# Altium PCB RFID.PcbDoc
Units mil, origin at the board's own origin, x right, y up, seen from the top; angles counter-clockwise.
Board outline 6000 x 4000 mil, 2 copper layers (Top Layer, Bottom Layer); 15 components, 40 nets, 91 pads, 0 vias.
Unrouted connection lines stored in the file: 1.
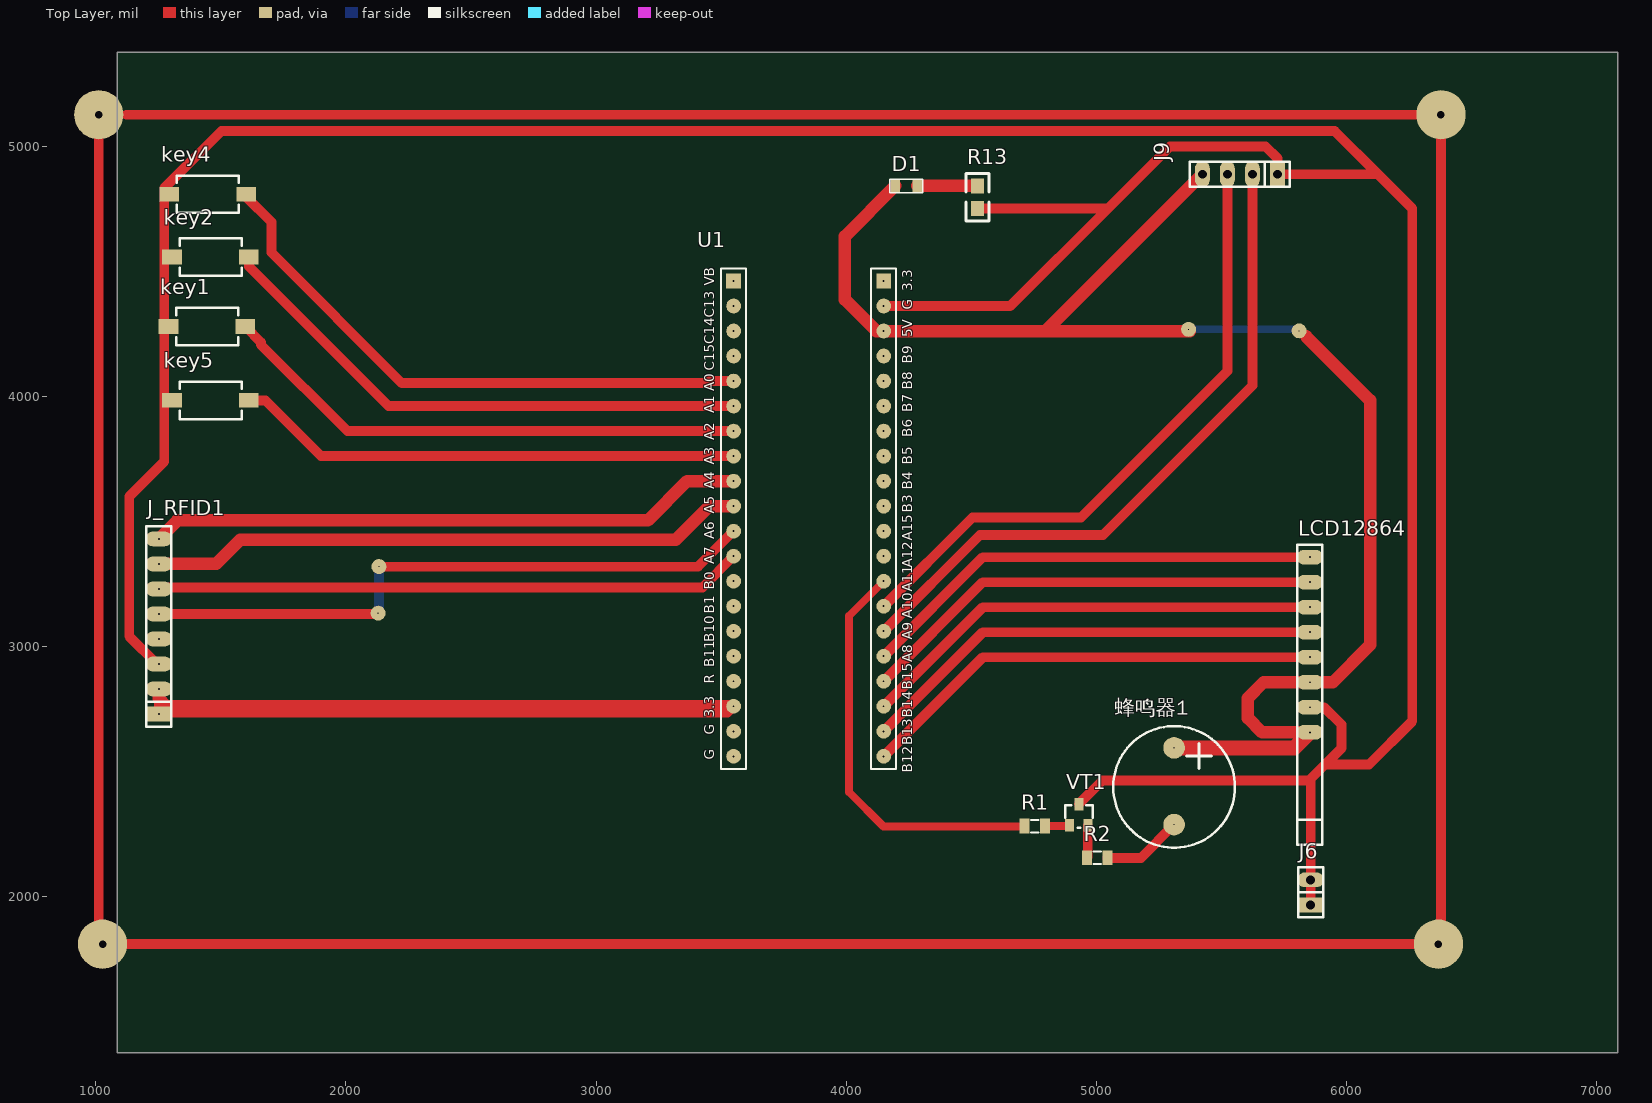
[diagram p0: Top Layer view]
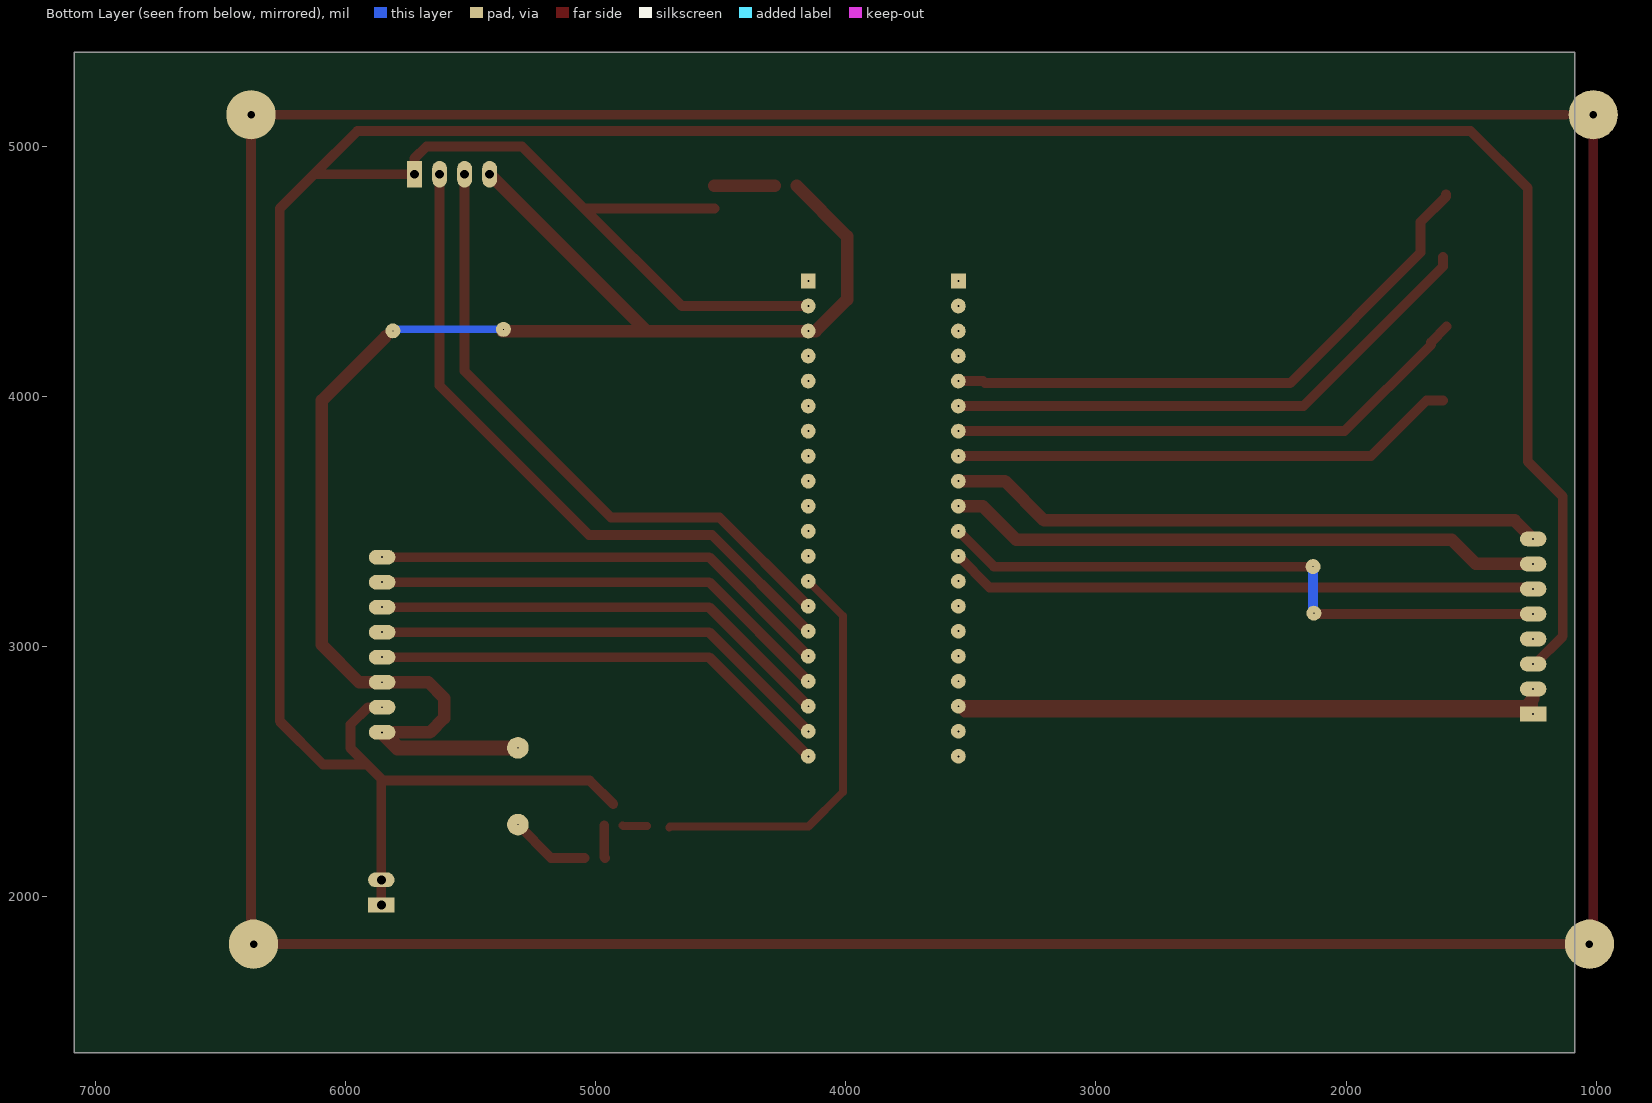
[diagram p1: Bottom Layer view, seen from below]

## Layer stack, top to bottom
Top Solder: solder mask 0.4, Solder Resist, Dk 3.5
Top Layer: signal copper 1.4
Dielectric1: dielectric 12.6, FR-4, Dk 4.8
Bottom Layer: signal copper 1.4
Bottom Solder: solder mask 0.4, Solder Resist, Dk 3.5

## Board outline
1085,1377 7085,1377 7085,5377 1085,5377

## Design rules (kind name [scope] priority, off if disabled: settings)
Clearance [All] p1: gap=10
PolygonConnect [All] p1: connectstyle=Relief reliefconductorwidth=10 reliefentries=4 polygonreliefangle="90 Angle" airgapwidth=10
RoutingVias [All] p1: holewidth=28 width=50 viastyle="Through Hole" minholewidth=28 minwidth=50 maxholewidth=28 maxwidth=50
SolderMaskExpansion [All] p1: expansion=4
Width [All] p1: maxlimit=100 minlimit=10 preferedwidth=39.37 minimp=50.000000 maximp=50.000000 favimp=50.000000
30 further rules are at their usual default settings.

## Components (designator, comment, footprint, x,y, rotation, side; value= is the part's Value field where it differs from the comment)
D1 "LED_O" D0805 4196,4842 r0 top
J6 "CON2" sip-2 5857,1968 r90 top
J9 "CON4" sip-4 5724,4889 r180 top
J_RFID1 "RFID_Reader" SIP-8 1252,2731 r90 top
key1 "" SW_SMD_P2 1598,4280 r180 top
key2 "" SW_SMD_P2 1612,4558 r180 top
key4 "" SW_SMD_P2 1601,4809 r180 top
key5 "" SW_SMD_P2 1612,3985 r180 top
LCD12864 "CON12" sip-12 5854,2258 r90 top
R1 "Res" 0805#1 4754,2283 r180 top
R2 "Res" 0805#1 5004,2156 r180 top
R13 "4.7K" 0805#2 4525,4842 r270 top
U1 "c8t6hxb" 48P 3400,2462 r90 top
VT1 "8550" SOT-23 4930,2324 r90 top
蜂鸣器1 "蜂鸣器" DB 5311,2596 r270 top

## Footprints (in the part's own frame and the unit in brackets; to place one, negate y for a bottom-side part, rotate by r counter-clockwise, add the part's x,y. Pads: shape width x height; smd on the part's side, far side on the other; paste and mask are expansions set on the pad)
48P [mm]
  rect 1.5x1.5 hole 0.2: 1(50.8,-3.81) 21(50.8,-19.05)
  round 1.5 hole 0.2: 2(48.26,-3.81) 3(45.72,-3.81) 4(43.18,-3.81) 5(40.64,-3.81) 6(38.1,-3.81) 7(35.56,-3.81) 8(33.02,-3.81) 9(30.48,-3.81) 10(27.94,-3.81) 11(25.4,-3.81) 12(22.86,-3.81) 13(20.32,-3.81) 14(17.78,-3.81) 15(15.24,-3.81) 16(12.7,-3.81) 17(10.16,-3.81) 18(7.62,-3.81) 19(5.08,-3.81) 20(2.54,-3.81) 22(48.26,-19.05) 23(45.72,-19.05) 24(43.18,-19.05) 25(40.64,-19.05) 26(38.1,-19.05) 27(35.56,-19.05) 28(33.02,-19.05) 29(30.48,-19.05) 30(27.94,-19.05) 31(25.4,-19.05) 32(22.86,-19.05) 33(20.32,-19.05) 34(17.78,-19.05) 35(15.24,-19.05) 36(12.7,-19.05) 37(10.16,-19.05) 38(7.62,-19.05) 39(5.08,-19.05) 40(2.54,-19.05)
  silkscreen extent 1.27,-20.32 52.07,-2.54
0805#1 [mm] "2.00mm×1.25mm"
  rect 1x1.5 smd: 1(-1.05,0) 2(1.05,0)
  silkscreen extent -0.4,-0.64 0.4,0.64, body extent -1.02,-0.64 1.02,0.64, height 0.61
0805#2 [mm]
  rect 1.524x1.27 smd: 1(0,0) 2(2.286,0)
  silkscreen extent -1.27,-1.14 3.56,1.14
D0805 [mm]
  rect 1x1.3 smd: 1(0,0) 2(2.235,0)
  silkscreen extent -0.56,-0.69 2.79,0.69
DB [mm]
  round 2.2 hole 0.1: 1(0,0) 2(7.8,0)
  silkscreen extent -2.2,-6.18 10.15,6.18
sip-2 [mm]
  rect 1.5x2.7 hole 0.9: 1(0,0)
  oval 1.5x2.7 hole 0.9: 2(2.54,0)
  silkscreen extent -1.27,-1.27 3.81,1.27
sip-4 [mm]
  rect 1.5x2.7 hole 0.9: 1(0,0)
  oval 1.5x2.7 hole 0.9: 2(2.54,0) 3(5.08,0) 4(7.62,0)
  silkscreen extent -1.27,-1.27 8.89,1.27
SIP-8 [mm]
  rect 1.5x2.7 hole 0.2: 1(0,0)
  oval 1.5x2.7 hole 0.2: 2(2.54,0) 3(5.08,0) 4(7.62,0) 5(10.16,0) 6(12.7,0) 7(15.24,0) 8(17.78,0)
  silkscreen extent -1.27,-1.27 19.05,1.27
sip-12 [mm]
  oval 1.5x2.7 hole 0.2: 5(10.16,0) 6(12.7,0) 7(15.24,0) 8(17.78,0) 9(20.32,0) 10(22.86,0) 11(25.4,0) 12(27.94,0)
  silkscreen extent -1.27,-1.27 29.21,1.27
SOT-23 [mil] "管脚顺时针排序，REF30××"
  rect 50x36 smd: 1(-38,-36) 3(47,0)
  rect 50x36 smd paste+0: 2(-38,37)
  silkscreen extent -48,-55 42,55, body extent -45,-57 52,57, height 39
SW_SMD_P2 [mm]
  rect 2x1.5 smd: 1(0,0) 2(7.8,0)
  silkscreen extent 0.73,-1.9 7.03,1.9, body extent -0.06,-1.94 7.83,1.91, height 2.5

## Part data
J6 J9 LCD12864: "Connector"
J_RFID1: library part CON8, "Connector"
key1 key2 key4 key5: library part SW-PB
R13: library part RES

## Free pads (board coordinates)
  round 60 hole 3.94: 12(2132,3320) 12(5369,4269) 12(5811,4263) 13(2129,3134)
  round 196.85 hole 30: 14(1012,5127) 14(1027,1811) 14(6368,1811) 14(6378,5127)

## Nets (pads, with @x,y where several pads share a name; then routed paths per layer and width w, separated by ;. In a path a pad name is that pad's centre, name@x,y a point inside that pad or via, vN(x,y) a via of type N, cw(c..) or ccw(c..) an arc to the next point about the centre after c; other vN are vias at no path point)
3.3V: U1.21
3.3V1: J_RFID1.1 J_RFID1.2 U1.18 | length 4721.7
  Top Layer w39.37: 1252,2793 J_RFID1.1 1258,2737 3525,2737 U1.18
  Top Layer w50: J_RFID1.2 1252,2793 1283,2762 U1.18
+5V: D1.1 J9.4 LCD12864.5 LCD12864.7 pad.12@5369,4269 pad.12@5811,4263 U1.23 蜂鸣器1.1 | length 6136.8
  Top Layer w50: D1.1 3995,4641 3995,4388 4121,4262 U1.23 4797,4262 ; pad.12@5374,4262 4797,4262 ; J9.4 4797,4262 ; 5839,4241 6095,3985 6095,3007 5946,2858 LCD12864.7 5669,2858 5606,2795 5606,2715 5663,2658 LCD12864.5
  Top Layer w60: 蜂鸣器1.1 5792,2596 LCD12864.5
  Bottom Layer w29.53: pad.12@5369,4269 5805,4269 pad.12@5811,4263
BEED: R1.2 U1.33 | length 1653.2
  Top Layer w31.5: U1.33 4012,3124 4012,2418 4149,2281 4703,2281 R1.2@4706,2278
GND: J6.1 J6.2 J9.1 J_RFID1.3 key1.2 key2.2 key4.2 key5.2 LCD12864.6 pad.14 R13.2 U1.22 VT1.3 | length 31653.5
  Top Layer w39.37: pad.14@1012,1826 pad.14@1012,5127 ; pad.14@1027,1811 6368,1811 6378,1821 6378,5127 1122,5127 ; J_RFID1.3 1244.64,2931 1134,3041.64 1134,3600 1273.91,3739.91 1273.91,4833.91 1502,5062 1829.91,5062 5953,5062 6126,4889 ; U1.22 4656,4362 5046,4752 ; R13.2 5046,4752 ; VT1.3 5024,2465 5851,2465 5915,2529 ; LCD12864.6 5911,2758 5980,2689 5980,2594 5915,2529 ; J6.1 J6.2 5857,2471 ; 5046,4752 5294,5000 5677,5000 5724,4953 J9.1 6126,4889 ; 5915,2529 6090,2529 6263,2702 6263,4752 6126,4889
LCD_CS: LCD12864.12 U1.36 | length 1868
  Top Layer w39.37: U1.36 4546,3358 LCD12864.12
LCD_RESET: LCD12864.11 U1.37 | length 1868
  Top Layer w39.37: U1.37 4546,3258 LCD12864.11
LCD_RS: LCD12864.10 U1.38 | length 1868
  Top Layer w39.37: U1.38 4546,3158 LCD12864.10
LCD_SCLK: LCD12864.8 U1.40 | length 1868
  Top Layer w39.37: U1.40 4546,2958 LCD12864.8
LCD_SDA: LCD12864.9 U1.39 | length 1868
  Top Layer w39.37: U1.39 4546,3058 LCD12864.9
NetD1_2: D1.2 R13.1 | length 241
  Top Layer w50: D1.2 R13.1
NetR1_1: R1.1 VT1.2 | length 98.9
  Top Layer w31.5: R1.1 4890,2283 VT1.2
NetR2_1: R2.1 蜂鸣器1.2 | length 320.7
  Top Layer w39.37: R2.1 5178.09,2156 蜂鸣器1.2
NetR2_2: R2.2 VT1.1 | length 131.4
  Top Layer w39.37: R2.2 4966,2159.34 VT1.1
NRST: U1.17
PA0: key4.1 U1.5 | length 2341.5
  Top Layer w39.37: key4.1 1601,4799 1702.5,4697.5 1702.5,4575.5 2223,4055 3444,4055 3451,4062 U1.5
PA1: key2.1 U1.6 | length 2207.1
  Top Layer w39.37: key2.1 1612,4520 2170,3962 U1.6
PA2: key1.1 U1.7 | length 2131
  Top Layer w39.37: key1.1 1661,4217 1661,4207 2006,3862 U1.7
PA3: key5.1 U1.8 | length 2030.4
  Top Layer w39.37: key5.1 1678,3985 1901,3762 U1.8
PA4: J_RFID1.8 U1.9 | length 2393.7
  Top Layer w50: J_RFID1.8 1326,3505 3207,3505 3364,3662 U1.9
PA5: J_RFID1.7 U1.10 | length 2393.7
  Top Layer w50: J_RFID1.7 1481,3331 1577,3427 3318,3427 3453,3562 U1.10
PA6: J_RFID1.5 pad.12@2132,3320 pad.13 U1.11 | length 2555
  Top Layer w39.37: J_RFID1.5@1258,3137 J_RFID1.5 2126,3131 pad.13 ; pad.12@2132,3320 3408,3320 U1.11
  Bottom Layer w39.37: J_RFID1.5 J_RFID1.5@1255,3134 ; pad.13 2132,3137 pad.12@2132,3320
PA7: J_RFID1.6 U1.12 | length 2352.3
  Top Layer w39.37: J_RFID1.6 1258,3237 3425,3237 U1.12
PA9: J9.2 U1.35 | length 2725.8
  Top Layer w39.37: U1.35 4535,3447 5027,3447 5624,4044 J9.2
PA10: J9.3 U1.34 | length 2550.4
  Top Layer w39.37: U1.34 4505,3517 4939,3517 5524,4102 J9.3
PA12: U1.32
PA15: U1.31
PB0: U1.13
PB1: U1.14
PB3: U1.30
PB4: U1.29 | length 9
  Top Layer w19.68: U1.29@4141,3662 U1.29
PB5: U1.28
PB6: U1.27
PB7: U1.26
PB8: U1.25
PB9: U1.24
PB10: U1.15
PB11: U1.16
PC14: U1.3
PC15: U1.4
pads on no net: J_RFID1.4 U1.1 U1.2 U1.19 U1.20

## Text inside footprints (layer, text, board x,y; h text height)
U1: Top Overlay "3.3" at 4265,4422 h40 r90; Top Overlay "G" at 4265,4347 h40 r90; Top Overlay "5V" at 4265,4237 h40 r90; Top Overlay "B9" at 4265,4132 h40 r90; Top Overlay "B8" at 4265,4027 h40 r90; Top Overlay "B7" at 4265,3937 h40 r90; Top Overlay "B6" at 4265,3837 h40 r90; Top Overlay "B5" at 4265,3727 h40 r90; Top Overlay "B4" at 4265,3627 h40 r90; Top Overlay "B3" at 4265,3535 h40 r90; Top Overlay "A15" at 4265,3423 h40 r90; Top Overlay "A12" at 4265,3315 h40 r90; Top Overlay "A11" at 4265,3220 h40 r90; Top Overlay "A10" at 4265,3112 h40 r90; Top Overlay "A9" at 4265,3027 h40 r90; Top Overlay "A8" at 4265,2937 h40 r90; Top Overlay "B15" at 4265,2827 h40 r90; Top Overlay "B14" at 4265,2717 h40 r90; Top Overlay "B13" at 4265,2607 h40 r90; Top Overlay "B12" at 4265,2497 h40 r90; Top Overlay "G" at 3473,2548 h40 r90; Top Overlay "G" at 3473,2648 h40 r90; Top Overlay "3.3" at 3473,2717 h40 r90; Top Overlay "VB" at 3473,4443 h40 r90; Top Overlay "A7" at 3473,3330 h40 r90; Top Overlay "C15C14C13" at 3473,4104 h40 r90; Top Overlay "A6" at 3473,3430 h40 r90; Top Overlay "A5" at 3473,3531 h40 r90; Top Overlay "A4" at 3473,3629 h40 r90; Top Overlay "A3" at 3473,3728.43 h40 r90; Top Overlay "A2" at 3473,3826.29 h40 r90; Top Overlay "A1" at 3473,3933 h40 r90; Top Overlay "A0" at 3473,4022 h40 r90; Top Overlay "B0" at 3473,3227 h40 r90; Top Overlay "B1" at 3473,3132 h40 r90; Top Overlay "B10" at 3473,3017 h40 r90; Top Overlay "B11" at 3473,2918 h40 r90; Top Overlay "R" at 3473,2852 h40 r90